# Altium PCB Jinkono Module вер.0.0.PcbDoc (part 2 of 2)
Units mm, origin at the board's own origin, x right, y up, seen from the top; angles counter-clockwise.
Board outline 90 x 80 mm, 2 copper layers (Top Layer, Bottom Layer); 154 components, 381 nets, 2588 pads, 0 vias.
Unrouted connection lines stored in the file: 1285.
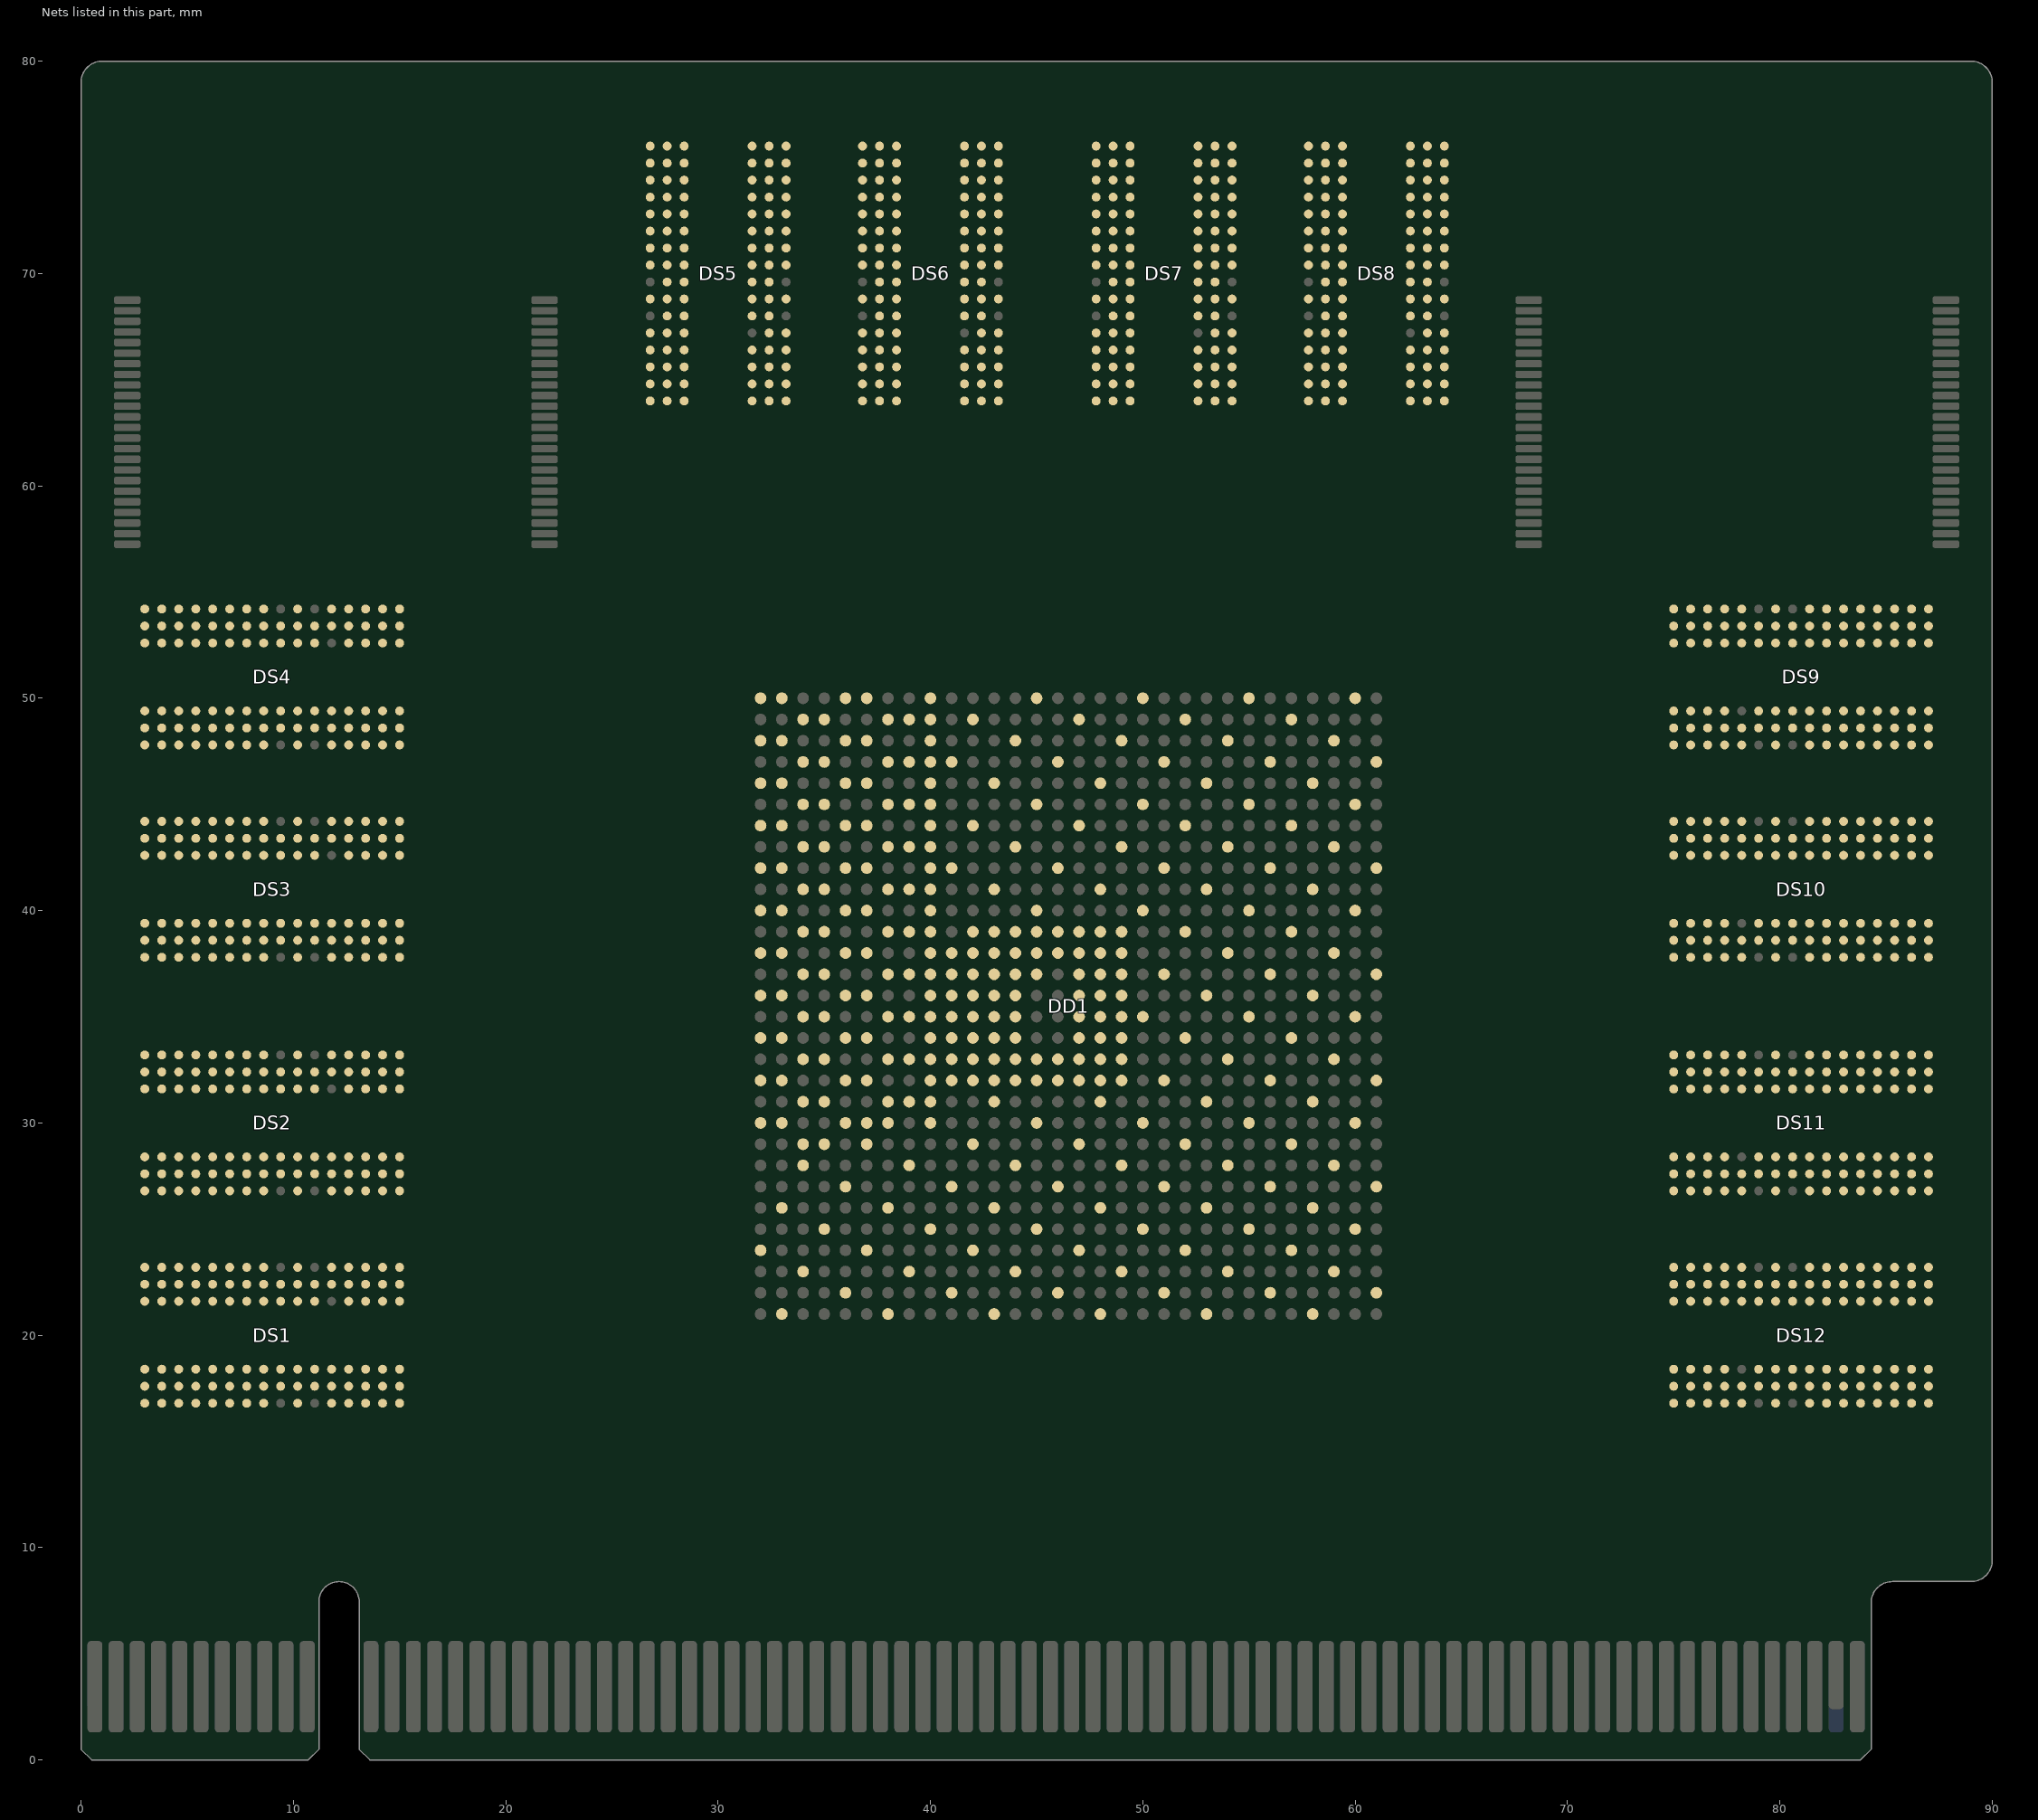
[diagram p2: the nets of this part, all layers, seen from the top]

## Part data
C1 C2 C3 C4 C5 C6 C7 C8 C9 C10 C11 C12 C13 C14 C15 C16 C17 C18: library part "Non Polar Hor.", TemperatureRange=-...+°C, ComponentType=Конденсатор, Install=1
C19 C20 C21 C25 C26 C27 C28 C29 C30 C40 C41 C42 C43 C44 C45 C46 C47 C48 C49 C50 C51: library part "Non Polar Ver.", "0603 10 мкФ ±10% 10 В X5R", TemperatureRange=-...+°C, ComponentType=Конденсатор, Install=1
C22 C23 C24 C31 C32 C33 C37 C38 C39: library part "Non Polar Ver.", "0402 0,1 мкФ ±10% 25 В X7R", TemperatureRange=-...+°C, ComponentType=Конденсатор, Install=1
C34 C35 C36: library part "Non Polar Ver.", "0402 0,01 мкФ ±10% 25 В X7R", TemperatureRange=-...+°C, ComponentType=Конденсатор, Install=1
DD1: library part XC7K325T-XFFG900, "Kintex-7 FPGA", Manufacturer="Xilinx Inc.", Package=900-FFG, TemperatureRange=-XX...+XX°C, ComponentType=IC, PinCount=900
DD2 DD3: library part MT29F32G08ABAAAWP-ITZ:A, "SLC NAND Flash 32 Гб", Manufacturer="Micron Technology, Inc.", Package=48-TSOP, TemperatureRange=-40...+85°C, ComponentType=IC, PartNumber=USB2534i-1080AEN, PinCount=48
DS1 DS2 DS3 DS4 DS5 DS6 DS7 DS8 DS9 DS10 DS11 DS12: library part MT41K256M16TW-107IT:P, "32 Megx16x8 banks DDR3L SDRAM", Manufacturer="Micron Technology, Inc.", TemperatureRange=-...+°C, ComponentType=Микросхема, Install=1
R1 R2 R3 R4 R5 R6 R7 R8 R9 R10 R11 R12 R13 R14 R15 R16 R17 R18 R19 R20 R21 R22 R23 R24 R25 R26 R27 R28 R29 R30 R31 R32 R33 R34 R35 R36 R37 R38 R39 R40 R41 R42 R43 R44 R45 R46 R47 R48 R49 R50 R51 R52 R53 R54 R55 R56 R57 R58 R59 R60 R61 R62 R63 R64 R65 R66 R67 R68 R69 R70 R71 R72 R73 R74 R75: library part "Resistor Hor.", TemperatureRange=-...+°C, ComponentType=Резистор, Install=1
R76 R77 R78: library part "Resistor Hor.", "0402 10 кОм ±1%", TemperatureRange=-...+°C, ComponentType=Резистор, Install=1
R79 R80 R81: library part "Resistor Ver.", "0402 10 кОм ±1%", TemperatureRange=-...+°C, ComponentType=Резистор, Install=1
R82 R83 R84: library part "Resistor Hor.", "0402 47 кОм ±5%", TemperatureRange=-...+°C, ComponentType=Резистор, Install=1
R85 R86 R87: library part "Resistor Ver.", "0402 47 кОм ±5%", TemperatureRange=-...+°C, ComponentType=Резистор, Install=1
XS1: library part XP_PCe_x16, TemperatureRange=-...+°C, ComponentType=Вилка, Install=1

## Nets (pads, with @x,y where several pads share a name; then routed paths per layer and width w, separated by ;. In a path a pad name is that pad's centre, name@x,y a point inside that pad or via, vN(x,y) a via of type N, cw(c..) or ccw(c..) an arc to the next point about the centre after c; other vN are vias at no path point)
1.5V_DDR3: C25.1 C26.1 C27.1 C28.1 C29.1 C30.1 C31.1 C32.1 C33.1 DS1.A1 DS1.A8 DS1.B2 DS1.C1 DS1.C9 DS1.D2 DS1.D9 DS1.E9 DS1.F1 DS1.G7 DS1.H2 DS1.H9 DS1.K2 DS1.K8 DS1.N1 DS1.N9 DS1.R1 DS1.R9 DS2.A1 DS2.A8 DS2.B2 DS2.C1 DS2.C9 DS2.D2 DS2.D9 DS2.E9 DS2.F1 DS2.G7 DS2.H2 DS2.H9 DS2.K2 DS2.K8 DS2.N1 DS2.N9 DS2.R1 DS2.R9 DS3.A1 DS3.A8 DS3.B2 DS3.C1 DS3.C9 DS3.D2 DS3.D9 DS3.E9 DS3.F1 DS3.G7 DS3.H2 DS3.H9 DS3.K2 DS3.K8 DS3.N1 DS3.N9 DS3.R1 DS3.R9 DS4.A1 DS4.A8 DS4.B2 DS4.C1 DS4.C9 DS4.D2 DS4.D9 DS4.E9 DS4.F1 DS4.G7 DS4.H2 DS4.H9 DS4.K2 DS4.K8 DS4.N1 DS4.N9 DS4.R1 DS4.R9 DS5.A1 DS5.A8 DS5.B2 DS5.C1 DS5.C9 DS5.D2 DS5.D9 DS5.E9 DS5.F1 DS5.G7 DS5.H2 DS5.H9 DS5.K2 DS5.K8 DS5.N1 DS5.N9 DS5.R1 DS5.R9 DS6.A1 DS6.A8 DS6.B2 DS6.C1 DS6.C9 DS6.D2 DS6.D9 DS6.E9 DS6.F1 DS6.G7 DS6.H2 DS6.H9 DS6.K2 DS6.K8 DS6.N1 DS6.N9 DS6.R1 DS6.R9 DS7.A1 DS7.A8 DS7.B2 DS7.C1 DS7.C9 DS7.D2 DS7.D9 DS7.E9 DS7.F1 DS7.G7 DS7.H2 DS7.H9 DS7.K2 DS7.K8 DS7.N1 DS7.N9 DS7.R1 DS7.R9 DS8.A1 DS8.A8 DS8.B2 DS8.C1 DS8.C9 DS8.D2 DS8.D9 DS8.E9 DS8.F1 DS8.G7 DS8.H2 DS8.H9 DS8.K2 DS8.K8 DS8.N1 DS8.N9 DS8.R1 DS8.R9 DS9.A1 DS9.A8 DS9.B2 DS9.C1 DS9.C9 DS9.D2 DS9.D9 DS9.E9 DS9.F1 DS9.G7 DS9.H2 DS9.H9 DS9.K2 DS9.K8 DS9.N1 DS9.N9 DS9.R1 DS9.R9 DS10.A1 DS10.A8 DS10.B2 DS10.C1 DS10.C9 DS10.D2 DS10.D9 DS10.E9 DS10.F1 DS10.G7 DS10.H2 DS10.H9 DS10.K2 DS10.K8 DS10.N1 DS10.N9 DS10.R1 DS10.R9 DS11.A1 DS11.A8 DS11.B2 DS11.C1 DS11.C9 DS11.D2 DS11.D9 DS11.E9 DS11.F1 DS11.G7 DS11.H2 DS11.H9 DS11.K2 DS11.K8 DS11.N1 DS11.N9 DS11.R1 DS11.R9 DS12.A1 DS12.A8 DS12.B2 DS12.C1 DS12.C9 DS12.D2 DS12.D9 DS12.E9 DS12.F1 DS12.G7 DS12.H2 DS12.H9 DS12.K2 DS12.K8 DS12.N1 DS12.N9 DS12.R1 DS12.R9 R76.1 R77.1 R78.1
3.3V: C19.1 C20.1 C21.1 C22.1 C23.1 C24.1 R82.1 R83.1 R84.1
DDR3_A0_ZQ: DS1.L8 DS5.L8 DS9.L8
DDR3_A1_ZQ: DS2.L8 DS6.L8 DS10.L8
DDR3_A2_ZQ: DS3.L8 DS7.L8 DS11.L8
DDR3_A3_ZQ: DS4.L8 DS8.L8 DS12.L8
DDR3_A_A0: DS1.N3 DS2.N3 DS3.N3 DS4.N3 R1.1
DDR3_A_A1: DS1.P7 DS2.P7 DS3.P7 DS4.P7 R14.1
DDR3_A_A2: DS1.P3 DS2.P3 DS3.P3 DS4.P3 R2.1
DDR3_A_A3: DS1.N2 DS2.N2 DS3.N2 DS4.N2 R15.1
DDR3_A_A4: DS1.P8 DS2.P8 DS3.P8 DS4.P8 R3.1
DDR3_A_A5: DS1.P2 DS2.P2 DS3.P2 DS4.P2 R16.1
DDR3_A_A6: DS1.R8 DS2.R8 DS3.R8 DS4.R8 R4.1
DDR3_A_A7: DS1.R2 DS2.R2 DS3.R2 DS4.R2 R17.1
DDR3_A_A8: DS1.T8 DS2.T8 DS3.T8 DS4.T8 R5.1
DDR3_A_A9: DS1.R3 DS2.R3 DS3.R3 DS4.R3 R18.1
DDR3_A_A10: DS1.L7 DS2.L7 DS3.L7 DS4.L7 R6.1
DDR3_A_A11: DS1.R7 DS2.R7 DS3.R7 DS4.R7 R19.1
DDR3_A_A12: DS1.N7 DS2.N7 DS3.N7 DS4.N7 R7.1
DDR3_A_A13: DS1.T3 DS2.T3 DS3.T3 DS4.T3 R20.1
DDR3_A_A14: DS1.T7 DS2.T7 DS3.T7 DS4.T7 R8.1
DDR3_A_BA0: DS1.M2 DS2.M2 DS3.M2 DS4.M2 R21.1
DDR3_A_BA1: DS1.N8 DS2.N8 DS3.N8 DS4.N8 R9.1
DDR3_A_BA2: DS1.M3 DS2.M3 DS3.M3 DS4.M3 R22.1
DDR3_A_CK_N: DS1.K7 DS2.K7 DS3.K7 DS4.K7 R13.2
DDR3_A_CK_P: DS1.J7 DS2.J7 DS3.J7 DS4.J7 R13.1
DDR3_A_CKE: DS1.K9 DS2.K9 DS3.K9 DS4.K9 R10.1
DDR3_A_DM0: DS1.E7
DDR3_A_DM1: DS1.D3
DDR3_A_DM2: DS2.E7
DDR3_A_DM3: DS2.D3
DDR3_A_DM4: DS3.E7
DDR3_A_DM5: DS3.D3
DDR3_A_DM6: DS4.E7
DDR3_A_DM7: DS4.D3
DDR3_A_DQ0: DS1.E3
DDR3_A_DQ1: DS1.F7
DDR3_A_DQ2: DS1.F2
DDR3_A_DQ3: DS1.F8
DDR3_A_DQ4: DS1.H3
DDR3_A_DQ5: DS1.H8
DDR3_A_DQ6: DS1.G2
DDR3_A_DQ7: DS1.H7
DDR3_A_DQ8: DS1.D7
DDR3_A_DQ9: DS1.C3
DDR3_A_DQ10: DS1.C8
DDR3_A_DQ11: DS1.C2
DDR3_A_DQ12: DS1.A7
DDR3_A_DQ13: DS1.A2
DDR3_A_DQ14: DS1.B8
DDR3_A_DQ15: DS1.A3
DDR3_A_DQ16: DS2.E3
DDR3_A_DQ17: DS2.F7
DDR3_A_DQ18: DS2.F2
DDR3_A_DQ19: DS2.F8
DDR3_A_DQ20: DS2.H3
DDR3_A_DQ21: DS2.H8
DDR3_A_DQ22: DS2.G2
DDR3_A_DQ23: DS2.H7
DDR3_A_DQ24: DS2.D7
DDR3_A_DQ25: DS2.C3
DDR3_A_DQ26: DS2.C8
DDR3_A_DQ27: DS2.C2
DDR3_A_DQ28: DS2.A7
DDR3_A_DQ29: DS2.A2
DDR3_A_DQ30: DS2.B8
DDR3_A_DQ31: DS2.A3
DDR3_A_DQ32: DS3.E3
DDR3_A_DQ33: DS3.F7
DDR3_A_DQ34: DS3.F2
DDR3_A_DQ35: DS3.F8
DDR3_A_DQ36: DS3.H3
DDR3_A_DQ37: DS3.H8
DDR3_A_DQ38: DS3.G2
DDR3_A_DQ39: DS3.H7
DDR3_A_DQ40: DS3.D7
DDR3_A_DQ41: DS3.C3
DDR3_A_DQ42: DS3.C8
DDR3_A_DQ43: DS3.C2
DDR3_A_DQ44: DS3.A7
DDR3_A_DQ45: DS3.A2
DDR3_A_DQ46: DS3.B8
DDR3_A_DQ47: DS3.A3
DDR3_A_DQ48: DS4.E3
DDR3_A_DQ49: DS4.F7
DDR3_A_DQ50: DS4.F2
DDR3_A_DQ51: DS4.F8
DDR3_A_DQ52: DS4.H3
DDR3_A_DQ53: DS4.H8
DDR3_A_DQ54: DS4.G2
DDR3_A_DQ55: DS4.H7
DDR3_A_DQ56: DS4.D7
DDR3_A_DQ57: DS4.C3
DDR3_A_DQ58: DS4.C8
DDR3_A_DQ59: DS4.C2
DDR3_A_DQ60: DS4.A7
DDR3_A_DQ61: DS4.A2
DDR3_A_DQ62: DS4.B8
DDR3_A_DQ63: DS4.A3
DDR3_A_DQS0_N: DS1.G3
DDR3_A_DQS0_P: DS1.F3
DDR3_A_DQS1_N: DS1.B7
DDR3_A_DQS1_P: DS1.C7
DDR3_A_DQS2_N: DS2.G3
DDR3_A_DQS2_P: DS2.F3
DDR3_A_DQS3_N: DS2.B7
DDR3_A_DQS3_P: DS2.C7
DDR3_A_DQS4_N: DS3.G3
DDR3_A_DQS4_P: DS3.F3
DDR3_A_DQS5_N: DS3.B7
DDR3_A_DQS5_P: DS3.C7
DDR3_A_DQS6_N: DS4.G3
DDR3_A_DQS6_P: DS4.F3
DDR3_A_DQS7_N: DS4.B7
DDR3_A_DQS7_P: DS4.C7
DDR3_A_nCAS: DS1.K3 DS2.K3 DS3.K3 DS4.K3 R24.1
DDR3_A_nCS: DS1.L2 DS2.L2 DS3.L2 DS4.L2 R23.1
DDR3_A_nRAS: DS1.J3 DS2.J3 DS3.J3 DS4.J3 R11.1
DDR3_A_nRST: DS1.T2 DS2.T2 DS3.T2 DS4.T2
DDR3_A_nWE: DS1.L3 DS2.L3 DS3.L3 DS4.L3 R12.1
DDR3_A_ODT: DS1.K1 DS2.K1 DS3.K1 DS4.K1 R25.1
DDR3_B_A0: DS5.N3 DS6.N3 DS7.N3 DS8.N3 R26.1
DDR3_B_A1: DS5.P7 DS6.P7 DS7.P7 DS8.P7 R39.1
DDR3_B_A2: DS5.P3 DS6.P3 DS7.P3 DS8.P3 R27.1
DDR3_B_A3: DS5.N2 DS6.N2 DS7.N2 DS8.N2 R40.1
DDR3_B_A4: DS5.P8 DS6.P8 DS7.P8 DS8.P8 R28.1
DDR3_B_A5: DS5.P2 DS6.P2 DS7.P2 DS8.P2 R41.1
DDR3_B_A6: DS5.R8 DS6.R8 DS7.R8 DS8.R8 R29.1
DDR3_B_A7: DS5.R2 DS6.R2 DS7.R2 DS8.R2 R42.1
DDR3_B_A8: DS5.T8 DS6.T8 DS7.T8 DS8.T8 R30.1
DDR3_B_A9: DS5.R3 DS6.R3 DS7.R3 DS8.R3 R43.1
DDR3_B_A10: DS5.L7 DS6.L7 DS7.L7 DS8.L7 R31.1
DDR3_B_A11: DS5.R7 DS6.R7 DS7.R7 DS8.R7 R44.1
DDR3_B_A12: DS5.N7 DS6.N7 DS7.N7 DS8.N7 R32.1
DDR3_B_A13: DS5.T3 DS6.T3 DS7.T3 DS8.T3 R45.1
DDR3_B_A14: DS5.T7 DS6.T7 DS7.T7 DS8.T7 R33.1
DDR3_B_BA0: DS5.M2 DS6.M2 DS7.M2 DS8.M2 R46.1
DDR3_B_BA1: DS5.N8 DS6.N8 DS7.N8 DS8.N8 R34.1
DDR3_B_BA2: DS5.M3 DS6.M3 DS7.M3 DS8.M3 R47.1
DDR3_B_CK_N: DS5.K7 DS6.K7 DS7.K7 DS8.K7 R38.2
DDR3_B_CK_P: DS5.J7 DS6.J7 DS7.J7 DS8.J7 R38.1
DDR3_B_CKE: DS5.K9 DS6.K9 DS7.K9 DS8.K9 R35.1
DDR3_B_DM0: DS5.E7
DDR3_B_DM1: DS5.D3
DDR3_B_DM2: DS6.E7
DDR3_B_DM3: DS6.D3
DDR3_B_DM4: DS7.E7
DDR3_B_DM5: DS7.D3
DDR3_B_DM6: DS8.E7
DDR3_B_DM7: DS8.D3
DDR3_B_DQ0: DS5.E3
DDR3_B_DQ1: DS5.F7
DDR3_B_DQ2: DS5.F2
DDR3_B_DQ3: DS5.F8
DDR3_B_DQ4: DS5.H3
DDR3_B_DQ5: DS5.H8
DDR3_B_DQ6: DS5.G2
DDR3_B_DQ7: DS5.H7
DDR3_B_DQ8: DS5.D7
DDR3_B_DQ9: DS5.C3
DDR3_B_DQ10: DS5.C8
DDR3_B_DQ11: DS5.C2
DDR3_B_DQ12: DS5.A7
DDR3_B_DQ13: DS5.A2
DDR3_B_DQ14: DS5.B8
DDR3_B_DQ15: DS5.A3
DDR3_B_DQ16: DS6.E3
DDR3_B_DQ17: DS6.F7
DDR3_B_DQ18: DS6.F2
DDR3_B_DQ19: DS6.F8
DDR3_B_DQ20: DS6.H3
DDR3_B_DQ21: DS6.H8
DDR3_B_DQ22: DS6.G2
DDR3_B_DQ23: DS6.H7
DDR3_B_DQ24: DS6.D7
DDR3_B_DQ25: DS6.C3
DDR3_B_DQ26: DS6.C8
DDR3_B_DQ27: DS6.C2
DDR3_B_DQ28: DS6.A7
DDR3_B_DQ29: DS6.A2
DDR3_B_DQ30: DS6.B8
DDR3_B_DQ31: DS6.A3
DDR3_B_DQ32: DS7.E3
DDR3_B_DQ33: DS7.F7
DDR3_B_DQ34: DS7.F2
DDR3_B_DQ35: DS7.F8
DDR3_B_DQ36: DS7.H3
DDR3_B_DQ37: DS7.H8
DDR3_B_DQ38: DS7.G2
DDR3_B_DQ39: DS7.H7
DDR3_B_DQ40: DS7.D7
DDR3_B_DQ41: DS7.C3
DDR3_B_DQ42: DS7.C8
DDR3_B_DQ43: DS7.C2
DDR3_B_DQ44: DS7.A7
DDR3_B_DQ45: DS7.A2
DDR3_B_DQ46: DS7.B8
DDR3_B_DQ47: DS7.A3
DDR3_B_DQ48: DS8.E3
DDR3_B_DQ49: DS8.F7
DDR3_B_DQ50: DS8.F2
DDR3_B_DQ51: DS8.F8
DDR3_B_DQ52: DS8.H3
DDR3_B_DQ53: DS8.H8
DDR3_B_DQ54: DS8.G2
DDR3_B_DQ55: DS8.H7
DDR3_B_DQ56: DS8.D7
DDR3_B_DQ57: DS8.C3
DDR3_B_DQ58: DS8.C8
DDR3_B_DQ59: DS8.C2
DDR3_B_DQ60: DS8.A7
DDR3_B_DQ61: DS8.A2
DDR3_B_DQ62: DS8.B8
DDR3_B_DQ63: DS8.A3
DDR3_B_DQS0_N: DS5.G3
DDR3_B_DQS0_P: DS5.F3
DDR3_B_DQS1_N: DS5.B7
DDR3_B_DQS1_P: DS5.C7
DDR3_B_DQS2_N: DS6.G3
DDR3_B_DQS2_P: DS6.F3
DDR3_B_DQS3_N: DS6.B7
DDR3_B_DQS3_P: DS6.C7
DDR3_B_DQS4_N: DS7.G3
DDR3_B_DQS4_P: DS7.F3
DDR3_B_DQS5_N: DS7.B7
DDR3_B_DQS5_P: DS7.C7
DDR3_B_DQS6_N: DS8.G3
DDR3_B_DQS6_P: DS8.F3
DDR3_B_DQS7_N: DS8.B7
DDR3_B_DQS7_P: DS8.C7
DDR3_B_nCAS: DS5.K3 DS6.K3 DS7.K3 DS8.K3 R49.1
DDR3_B_nCS: DS5.L2 DS6.L2 DS7.L2 DS8.L2 R48.1
DDR3_B_nRAS: DS5.J3 DS6.J3 DS7.J3 DS8.J3 R36.1
DDR3_B_nRST: DS5.T2 DS6.T2 DS7.T2 DS8.T2
DDR3_B_nWE: DS5.L3 DS6.L3 DS7.L3 DS8.L3 R37.1
DDR3_B_ODT: DS5.K1 DS6.K1 DS7.K1 DS8.K1 R50.1
DDR3_C_A0: DS9.N3 DS10.N3 DS11.N3 DS12.N3 R51.1
DDR3_C_A1: DS9.P7 DS10.P7 DS11.P7 DS12.P7 R64.1
DDR3_C_A2: DS9.P3 DS10.P3 DS11.P3 DS12.P3 R52.1
DDR3_C_A3: DS9.N2 DS10.N2 DS11.N2 DS12.N2 R65.1
DDR3_C_A4: DS9.P8 DS10.P8 DS11.P8 DS12.P8 R53.1
DDR3_C_A5: DS9.P2 DS10.P2 DS11.P2 DS12.P2 R66.1
DDR3_C_A6: DS9.R8 DS10.R8 DS11.R8 DS12.R8 R54.1
DDR3_C_A7: DS9.R2 DS10.R2 DS11.R2 DS12.R2 R67.1
DDR3_C_A8: DS9.T8 DS10.T8 DS11.T8 DS12.T8 R55.1
DDR3_C_A9: DS9.R3 DS10.R3 DS11.R3 DS12.R3 R68.1
DDR3_C_A10: DS9.L7 DS10.L7 DS11.L7 DS12.L7 R56.1
DDR3_C_A11: DS9.R7 DS10.R7 DS11.R7 DS12.R7 R69.1
DDR3_C_A12: DS9.N7 DS10.N7 DS11.N7 DS12.N7 R57.1
DDR3_C_A13: DS9.T3 DS10.T3 DS11.T3 DS12.T3 R70.1
DDR3_C_A14: DS9.T7 DS10.T7 DS11.T7 DS12.T7 R58.1
DDR3_C_BA0: DS9.M2 DS10.M2 DS11.M2 DS12.M2 R71.1
DDR3_C_BA1: DS9.N8 DS10.N8 DS11.N8 DS12.N8 R59.1
DDR3_C_BA2: DS9.M3 DS10.M3 DS11.M3 DS12.M3 R72.1
DDR3_C_CK_N: DS9.K7 DS10.K7 DS11.K7 DS12.K7 R63.2
DDR3_C_CK_P: DS9.J7 DS10.J7 DS11.J7 DS12.J7 R63.1
DDR3_C_CKE: DS9.K9 DS10.K9 DS11.K9 DS12.K9 R60.1
DDR3_C_DM0: DS9.E7
DDR3_C_DM1: DS9.D3
DDR3_C_DM2: DS10.E7
DDR3_C_DM3: DS10.D3
DDR3_C_DM4: DS11.E7
DDR3_C_DM5: DS11.D3
DDR3_C_DM6: DS12.E7
DDR3_C_DM7: DS12.D3
DDR3_C_DQ0: DS9.E3
DDR3_C_DQ1: DS9.F7
DDR3_C_DQ2: DS9.F2
DDR3_C_DQ3: DS9.F8
DDR3_C_DQ4: DS9.H3
DDR3_C_DQ5: DS9.H8
DDR3_C_DQ6: DS9.G2
DDR3_C_DQ7: DS9.H7
DDR3_C_DQ8: DS9.D7
DDR3_C_DQ9: DS9.C3
DDR3_C_DQ10: DS9.C8
DDR3_C_DQ11: DS9.C2
DDR3_C_DQ12: DS9.A7
DDR3_C_DQ13: DS9.A2
DDR3_C_DQ14: DS9.B8
DDR3_C_DQ15: DS9.A3
DDR3_C_DQ16: DS10.E3
DDR3_C_DQ17: DS10.F7
DDR3_C_DQ18: DS10.F2
DDR3_C_DQ19: DS10.F8
DDR3_C_DQ20: DS10.H3
DDR3_C_DQ21: DS10.H8
DDR3_C_DQ22: DS10.G2
DDR3_C_DQ23: DS10.H7
DDR3_C_DQ24: DS10.D7
DDR3_C_DQ25: DS10.C3
DDR3_C_DQ26: DS10.C8
DDR3_C_DQ27: DS10.C2
DDR3_C_DQ28: DS10.A7
DDR3_C_DQ29: DS10.A2
DDR3_C_DQ30: DS10.B8
DDR3_C_DQ31: DS10.A3
DDR3_C_DQ32: DS11.E3
DDR3_C_DQ33: DS11.F7
DDR3_C_DQ34: DS11.F2
DDR3_C_DQ35: DS11.F8
DDR3_C_DQ36: DS11.H3
DDR3_C_DQ37: DS11.H8
DDR3_C_DQ38: DS11.G2
DDR3_C_DQ39: DS11.H7
DDR3_C_DQ40: DS11.D7
DDR3_C_DQ41: DS11.C3
DDR3_C_DQ42: DS11.C8
DDR3_C_DQ43: DS11.C2
DDR3_C_DQ44: DS11.A7
DDR3_C_DQ45: DS11.A2
DDR3_C_DQ46: DS11.B8
DDR3_C_DQ47: DS11.A3
DDR3_C_DQ48: DS12.E3
DDR3_C_DQ49: DS12.F7
DDR3_C_DQ50: DS12.F2
DDR3_C_DQ51: DS12.F8
DDR3_C_DQ52: DS12.H3
DDR3_C_DQ53: DS12.H8
DDR3_C_DQ54: DS12.G2
DDR3_C_DQ55: DS12.H7
DDR3_C_DQ56: DS12.D7
DDR3_C_DQ57: DS12.C3
DDR3_C_DQ58: DS12.C8
DDR3_C_DQ59: DS12.C2
DDR3_C_DQ60: DS12.A7
DDR3_C_DQ61: DS12.A2
DDR3_C_DQ62: DS12.B8
DDR3_C_DQ63: DS12.A3
DDR3_C_DQS0_N: DS9.G3
DDR3_C_DQS0_P: DS9.F3
DDR3_C_DQS1_N: DS9.B7
DDR3_C_DQS1_P: DS9.C7
DDR3_C_DQS2_N: DS10.G3
DDR3_C_DQS2_P: DS10.F3
DDR3_C_DQS3_N: DS10.B7
DDR3_C_DQS3_P: DS10.C7
DDR3_C_DQS4_N: DS11.G3
DDR3_C_DQS4_P: DS11.F3
DDR3_C_DQS5_N: DS11.B7
DDR3_C_DQS5_P: DS11.C7
DDR3_C_DQS6_N: DS12.G3
DDR3_C_DQS6_P: DS12.F3
DDR3_C_DQS7_N: DS12.B7
DDR3_C_DQS7_P: DS12.C7
DDR3_C_nCAS: DS9.K3 DS10.K3 DS11.K3 DS12.K3 R74.1
DDR3_C_nCS: DS9.L2 DS10.L2 DS11.L2 DS12.L2 R73.1
DDR3_C_nRAS: DS9.J3 DS10.J3 DS11.J3 DS12.J3 R61.1
DDR3_C_nRST: DS9.T2 DS10.T2 DS11.T2 DS12.T2
DDR3_C_nWE: DS9.L3 DS10.L3 DS11.L3 DS12.L3 R62.1
DDR3_C_ODT: DS9.K1 DS10.K1 DS11.K1 DS12.K1 R75.1
EN_VTT_A: R85.1 R86.1 R87.1
GND: C1.2 C2.2 C3.2 C4.2 C5.2 C6.2 C7.2 C8.2 C9.2 C10.2 C11.2 C12.2 C13.2 C14.2 C15.2 C16.2 C17.2 C18.2 C19.2 C20.2 C21.2 C22.2 C23.2 C24.2 C25.2 C26.2 C27.2 C28.2 C29.2 C30.2 C31.2 C32.2 C33.2 C34.2 C35.2 C36.2 C37.2 C38.2 C39.2 C40.2 C41.2 C42.2 C43.2 C44.2 C45.2 C46.2 C47.2 C48.2 C49.2 C50.2 C51.2 DD1.A1 DD1.A2 DD1.A5 DD1.A6 DD1.A9 DD1.A14 DD1.A24 DD1.AA1 DD1.AA2 DD1.AA5 DD1.AA6 DD1.AA7 DD1.AA14 DD1.AA24 DD1.AB3 DD1.AB4 DD1.AB11 DD1.AB21 DD1.AC8 DD1.AC18 DD1.AC28 DD1.AD5 DD1.AD15 DD1.AD25 DD1.AE2 DD1.AE12 DD1.AE22 DD1.AF9 DD1.AF19 DD1.AF29 DD1.AG6 DD1.AG16 DD1.AG26 DD1.AH3 DD1.AH13 DD1.AH23 DD1.AJ10 DD1.AJ20 DD1.AJ30 DD1.AK7 DD1.AK17 DD1.AK27 DD1.B4 DD1.B8 DD1.B9 DD1.B11 DD1.B21 DD1.C1 DD1.C2 DD1.C6 DD1.C9 DD1.C18 DD1.C28 DD1.D4 DD1.D8 DD1.D9 DD1.D15 DD1.D25 DD1.E1 DD1.E2 DD1.E6 DD1.E9 DD1.E12 DD1.E22 DD1.F4 DD1.F8 DD1.F9 DD1.F19 DD1.F29 DD1.G1 DD1.G2 DD1.G6 DD1.G9 DD1.G16 DD1.G26 DD1.H4 DD1.H8 DD1.H9 DD1.H13 DD1.H23 DD1.J1 DD1.J2 DD1.J6 DD1.J9 DD1.J10 DD1.J20 DD1.J30 DD1.K4 DD1.K8 DD1.K9 DD1.K17 DD1.K27 DD1.L1 DD1.L2 DD1.L6 DD1.L9 DD1.L14 DD1.L24 DD1.M4 DD1.M8 DD1.M9 DD1.M12 DD1.M14 DD1.M16 DD1.M18 DD1.M21 DD1.N1 DD1.N2 DD1.N6 DD1.N9 DD1.N11 DD1.N13 DD1.N15 DD1.N17 DD1.N28 DD1.P4 DD1.P8 DD1.P9 DD1.P10 DD1.P12 DD1.P14 DD1.P16 DD1.P18 DD1.P25 DD1.R1 DD1.R2 DD1.R6 DD1.R9 DD1.R11 DD1.R13 DD1.R17 DD1.R22 DD1.T4 DD1.T8 DD1.T10 DD1.T12 DD1.T16 DD1.T18 DD1.T19 DD1.T29 DD1.U1 DD1.U2 DD1.U6 DD1.U9 DD1.U11 DD1.U13 DD1.U17 DD1.U26 DD1.V4 DD1.V8 DD1.V9 DD1.V10 DD1.V12 DD1.V14 DD1.V16 DD1.V18 DD1.V23 DD1.W1 DD1.W2 DD1.W6 DD1.W9 DD1.W11 DD1.W13 DD1.W15 DD1.W17 DD1.W20 DD1.W30 DD1.Y3 DD1.Y4 DD1.Y7 DD1.Y8 DD1.Y9 DD1.Y17 DD1.Y27 DS1.A9 DS1.B1 DS1.B3 DS1.B9 DS1.D1 DS1.D8 DS1.E1 DS1.E2 DS1.E8 DS1.F9 DS1.G1 DS1.G8 DS1.G9 DS1.J2 DS1.J8 DS1.M1 DS1.M9 DS1.P1 DS1.P9 DS1.T1 DS1.T9 DS2.A9 DS2.B1 DS2.B3 DS2.B9 DS2.D1 DS2.D8 DS2.E1 DS2.E2 DS2.E8 DS2.F9 DS2.G1 DS2.G8 DS2.G9 DS2.J2 DS2.J8 DS2.M1 DS2.M9 DS2.P1 DS2.P9 DS2.T1 DS2.T9 DS3.A9 DS3.B1 DS3.B3 DS3.B9 DS3.D1 DS3.D8 DS3.E1 DS3.E2 DS3.E8 DS3.F9 DS3.G1 DS3.G8 DS3.G9 DS3.J2 DS3.J8 DS3.M1 DS3.M9 DS3.P1 DS3.P9 DS3.T1 DS3.T9 DS4.A9 DS4.B1 DS4.B3 DS4.B9 DS4.D1 DS4.D8 DS4.E1 DS4.E2 DS4.E8 DS4.F9 DS4.G1 DS4.G8 DS4.G9 DS4.J2 DS4.J8 DS4.M1 DS4.M9 DS4.P1 DS4.P9 DS4.T1 DS4.T9 DS5.A9 DS5.B1 DS5.B3 DS5.B9 DS5.D1 DS5.D8 DS5.E1 DS5.E2 DS5.E8 DS5.F9 DS5.G1 DS5.G8 DS5.G9 DS5.J2 DS5.J8 DS5.M1 DS5.M9 DS5.P1 DS5.P9 DS5.T1 DS5.T9 DS6.A9 DS6.B1 DS6.B3 DS6.B9 DS6.D1 DS6.D8 DS6.E1 DS6.E2 DS6.E8 DS6.F9 DS6.G1 DS6.G8 DS6.G9 DS6.J2 DS6.J8 DS6.M1 DS6.M9 DS6.P1 DS6.P9 DS6.T1 DS6.T9 DS7.A9 DS7.B1 DS7.B3 DS7.B9 DS7.D1 DS7.D8 DS7.E1 DS7.E2 DS7.E8 DS7.F9 DS7.G1 DS7.G8 DS7.G9 DS7.J2 DS7.J8 DS7.M1 DS7.M9 DS7.P1 DS7.P9 DS7.T1 DS7.T9 DS8.A9 DS8.B1 DS8.B3 DS8.B9 DS8.D1 DS8.D8 DS8.E1 DS8.E2 DS8.E8 DS8.F9 DS8.G1 DS8.G8 DS8.G9 DS8.J2 DS8.J8 DS8.M1 DS8.M9 DS8.P1 DS8.P9 DS8.T1 DS8.T9 DS9.A9 DS9.B1 DS9.B3 DS9.B9 DS9.D1 DS9.D8 DS9.E1 DS9.E2 DS9.E8 DS9.F9 DS9.G1 DS9.G8 DS9.G9 DS9.J2 DS9.J8 DS9.M1 DS9.M9 DS9.P1 DS9.P9 DS9.T1 DS9.T9 DS10.A9 DS10.B1 DS10.B3 DS10.B9 DS10.D1 DS10.D8 DS10.E1 DS10.E2 DS10.E8 DS10.F9 DS10.G1 DS10.G8 DS10.G9 DS10.J2 DS10.J8 DS10.M1 DS10.M9 DS10.P1 DS10.P9 DS10.T1 DS10.T9 DS11.A9 DS11.B1 DS11.B3 DS11.B9 DS11.D1 DS11.D8 DS11.E1 DS11.E2 DS11.E8 DS11.F9 DS11.G1 DS11.G8 DS11.G9 DS11.J2 DS11.J8 DS11.M1 DS11.M9 DS11.P1 DS11.P9 DS11.T1 DS11.T9 DS12.A9 DS12.B1 DS12.B3 DS12.B9 DS12.D1 DS12.D8 DS12.E1 DS12.E2 DS12.E8 DS12.F9 DS12.G1 DS12.G8 DS12.G9 DS12.J2 DS12.J8 DS12.M1 DS12.M9 DS12.P1 DS12.P9 DS12.T1 DS12.T9 R79.2 R80.2 R81.2 R85.2 R86.2 R87.2
NetC34_1: C34.1 R76.2 R79.1
NetC35_1: C35.1 R77.2 R80.1
NetC36_1: C36.1 R78.2 R81.1
NetDD1_A19: DD1.A19 DD1.B16 DD1.D20 DD1.E17 DD1.G21 DD1.H18 DD1.L19
NetDD1_A29: DD1.A29 DD1.B26 DD1.C23 DD1.D30 DD1.E27 DD1.F24 DD1.H28
NetDD1_AA9: DD1.AA9 DD1.AC13 DD1.AD10 DD1.AG11 DD1.AK12 DD1.Y12
NetDD1_AA19: DD1.AA19 DD1.AB16 DD1.AE17 DD1.AF14 DD1.AH18 DD1.AJ15
NetDD1_AA29: DD1.AA29 DD1.AB26 DD1.AD30 DD1.AE27 DD1.AH28 DD1.AJ25
NetDD1_AB6: DD1.AB6 DD1.T9
NetDD1_AC3: DD1.AC3 DD1.AE7 DD1.AF4 DD1.AG1 DD1.AH8 DD1.AJ5 DD1.AK2
NetDD1_AC23: DD1.AC23 DD1.AD20 DD1.AF24 DD1.AG21 DD1.AK22 DD1.Y22
NetDD1_B3: DD1.B3 DD1.C5 DD1.D3 DD1.E5 DD1.F3 DD1.G5 DD1.H3 DD1.J5 DD1.K3 DD1.L5 DD1.M3 DD1.N5 DD1.P3 DD1.R5 DD1.T3 DD1.U5 DD1.V3 DD1.W5
NetDD1_B7: DD1.B7 DD1.D7 DD1.F7 DD1.H7 DD1.K7 DD1.M7 DD1.P7
NetDD1_C13: DD1.C13 DD1.D10 DD1.F14 DD1.G11 DD1.J15 DD1.K12
NetDD1_J25: DD1.J25 DD1.K22 DD1.L29 DD1.M26 DD1.N23 DD1.P20
NetDD1_M11: DD1.M11 DD1.M13 DD1.M15 DD1.M17 DD1.N10 DD1.N12 DD1.N14 DD1.N18 DD1.P11 DD1.P17 DD1.R10 DD1.R12 DD1.R18 DD1.T11 DD1.T17 DD1.U10 DD1.U12 DD1.U18 DD1.V17 DD1.W18
NetDD1_N16: DD1.N16 DD1.R16 DD1.U16 DD1.W16
NetDD1_P13: DD1.P13 DD1.T13 DD1.V13 DD1.V15 DD1.W14
NetDD1_P30: DD1.P30 DD1.R27 DD1.T24 DD1.U21 DD1.V28 DD1.W25
NetDD1_T7: DD1.T7 DD1.V7
NetDD1_V11: DD1.V11 DD1.W10 DD1.W12
PGD_VTT_A: R82.2 R83.2 R84.2
VREF_A: C37.1 C40.1 DS1.H1 DS1.M8 DS2.H1 DS2.M8 DS3.H1 DS3.M8 DS4.H1 DS4.M8
VREF_B: C38.1 C41.1 DS5.H1 DS5.M8 DS6.H1 DS6.M8 DS7.H1 DS7.M8 DS8.H1 DS8.M8
VREF_C: C39.1 C42.1 DS9.H1 DS9.M8 DS10.H1 DS10.M8 DS11.H1 DS11.M8 DS12.H1 DS12.M8
VTT_A: C1.1 C2.1 C3.1 C4.1 C5.1 C6.1 C43.1 C46.1 C49.1 R1.2 R2.2 R3.2 R4.2 R5.2 R6.2 R7.2 R8.2 R9.2 R10.2 R11.2 R12.2 R14.2 R15.2 R16.2 R17.2 R18.2 R19.2 R20.2 R21.2 R22.2 R23.2 R24.2 R25.2
VTT_B: C7.1 C8.1 C9.1 C10.1 C11.1 C12.1 C44.1 C47.1 C50.1 R26.2 R27.2 R28.2 R29.2 R30.2 R31.2 R32.2 R33.2 R34.2 R35.2 R36.2 R37.2 R39.2 R40.2 R41.2 R42.2 R43.2 R44.2 R45.2 R46.2 R47.2 R48.2 R49.2 R50.2
VTT_C: C13.1 C14.1 C15.1 C16.1 C17.1 C18.1 C45.1 C48.1 C51.1 R51.2 R52.2 R53.2 R54.2 R55.2 R56.2 R57.2 R58.2 R59.2 R60.2 R61.2 R62.2 R64.2 R65.2 R66.2 R67.2 R68.2 R69.2 R70.2 R71.2 R72.2 R73.2 R74.2 R75.2
pads on no net: DD1.A3 DD1.A4 DD1.A7 DD1.A8 DD1.A10 DD1.A11 DD1.A12 DD1.A13 DD1.A15 DD1.A16 DD1.A17 DD1.A18 DD1.A20 DD1.A21 DD1.A22 DD1.A23 DD1.A25 DD1.A26 DD1.A27 DD1.A28 DD1.A30 DD1.AA3 DD1.AA4 DD1.AA8 DD1.AA10 DD1.AA11 DD1.AA12 DD1.AA13 DD1.AA15 DD1.AA16 DD1.AA17 DD1.AA18 DD1.AA20 DD1.AA21 DD1.AA22 DD1.AA23 DD1.AA25 DD1.AA26 DD1.AA27 DD1.AA28 DD1.AA30 DD1.AB1 DD1.AB2 DD1.AB5 DD1.AB7 DD1.AB8 DD1.AB9 DD1.AB10 DD1.AB12 DD1.AB13 DD1.AB14 DD1.AB15 DD1.AB17 DD1.AB18 DD1.AB19 DD1.AB20 DD1.AB22 DD1.AB23 DD1.AB24 DD1.AB25 DD1.AB27 DD1.AB28 DD1.AB29 DD1.AB30 DD1.AC1 DD1.AC2 DD1.AC4 DD1.AC5 DD1.AC6 DD1.AC7 DD1.AC9 DD1.AC10 DD1.AC11 DD1.AC12 DD1.AC14 DD1.AC15 DD1.AC16 DD1.AC17 DD1.AC19 DD1.AC20 DD1.AC21 DD1.AC22 DD1.AC24 DD1.AC25 DD1.AC26 DD1.AC27 DD1.AC29 DD1.AC30 DD1.AD1 DD1.AD2 DD1.AD3 DD1.AD4 DD1.AD6 DD1.AD7 DD1.AD8 DD1.AD9 DD1.AD11 DD1.AD12 DD1.AD13 DD1.AD14 DD1.AD16 DD1.AD17 DD1.AD18 DD1.AD19 DD1.AD21 DD1.AD22 DD1.AD23 DD1.AD24 DD1.AD26 DD1.AD27 DD1.AD28 DD1.AD29 DD1.AE1 DD1.AE3 DD1.AE4 DD1.AE5 DD1.AE6 DD1.AE8 DD1.AE9 DD1.AE10 DD1.AE11 DD1.AE13 DD1.AE14 DD1.AE15 DD1.AE16 DD1.AE18 DD1.AE19 DD1.AE20 DD1.AE21 DD1.AE23 DD1.AE24 DD1.AE25 DD1.AE26 DD1.AE28 DD1.AE29 DD1.AE30 DD1.AF1 DD1.AF2 DD1.AF3 DD1.AF5 DD1.AF6 DD1.AF7 DD1.AF8 DD1.AF10 DD1.AF11 DD1.AF12 DD1.AF13 DD1.AF15 DD1.AF16 DD1.AF17 DD1.AF18 DD1.AF20 DD1.AF21 DD1.AF22 DD1.AF23 DD1.AF25 DD1.AF26 DD1.AF27 DD1.AF28 DD1.AF30 DD1.AG2 DD1.AG3 DD1.AG4 DD1.AG5 DD1.AG7 DD1.AG8 DD1.AG9 DD1.AG10 DD1.AG12 DD1.AG13 DD1.AG14 DD1.AG15 DD1.AG17 DD1.AG18 DD1.AG19 DD1.AG20 DD1.AG22 DD1.AG23 DD1.AG24 DD1.AG25 DD1.AG27 DD1.AG28 DD1.AG29 DD1.AG30 DD1.AH1 DD1.AH2 DD1.AH4 DD1.AH5 DD1.AH6 DD1.AH7 DD1.AH9 DD1.AH10 DD1.AH11 DD1.AH12 DD1.AH14 DD1.AH15 DD1.AH16 DD1.AH17 DD1.AH19 DD1.AH20 DD1.AH21 DD1.AH22 DD1.AH24 DD1.AH25 DD1.AH26 DD1.AH27 DD1.AH29 DD1.AH30 DD1.AJ1 DD1.AJ2 DD1.AJ3 DD1.AJ4 DD1.AJ6 DD1.AJ7 DD1.AJ8 DD1.AJ9 DD1.AJ11 DD1.AJ12 DD1.AJ13 DD1.AJ14 DD1.AJ16 DD1.AJ17 DD1.AJ18 DD1.AJ19 DD1.AJ21 DD1.AJ22 DD1.AJ23 DD1.AJ24 DD1.AJ26 DD1.AJ27 DD1.AJ28 DD1.AJ29 DD1.AK1 DD1.AK3 DD1.AK4 DD1.AK5 DD1.AK6 DD1.AK8 DD1.AK9 DD1.AK10 DD1.AK11 DD1.AK13 DD1.AK14 DD1.AK15 DD1.AK16 DD1.AK18 DD1.AK19 DD1.AK20 DD1.AK21 DD1.AK23 DD1.AK24 DD1.AK25 DD1.AK26 DD1.AK28 DD1.AK29 DD1.AK30 DD1.B1 DD1.B2 DD1.B5 DD1.B6 DD1.B10 DD1.B12 DD1.B13 DD1.B14 DD1.B15 DD1.B17 DD1.B18 DD1.B19 DD1.B20 DD1.B22 DD1.B23 DD1.B24 DD1.B25 DD1.B27 DD1.B28 DD1.B29 DD1.B30 DD1.C3 DD1.C4 DD1.C7 DD1.C8 DD1.C10 DD1.C11 DD1.C12 DD1.C14 DD1.C15 DD1.C16 DD1.C17 DD1.C19 DD1.C20 DD1.C21 DD1.C22 DD1.C24 DD1.C25 DD1.C26 DD1.C27 DD1.C29 DD1.C30 DD1.D1 DD1.D2 DD1.D5 DD1.D6 DD1.D11 DD1.D12 DD1.D13 DD1.D14 DD1.D16 DD1.D17 DD1.D18 DD1.D19 DD1.D21 DD1.D22 DD1.D23 DD1.D24 DD1.D26 DD1.D27 DD1.D28 DD1.D29 DD1.E3 DD1.E4 DD1.E7 DD1.E8 DD1.E10 DD1.E11 DD1.E13 DD1.E14 DD1.E15 DD1.E16 DD1.E18 DD1.E19 DD1.E20 DD1.E21 DD1.E23 DD1.E24 DD1.E25 DD1.E26 DD1.E28 DD1.E29 DD1.E30 DD1.F1 DD1.F2 DD1.F5 DD1.F6 DD1.F10 DD1.F11 DD1.F12 DD1.F13 DD1.F15 DD1.F16 DD1.F17 DD1.F18 DD1.F20 DD1.F21 DD1.F22 DD1.F23 DD1.F25 DD1.F26 DD1.F27 DD1.F28 DD1.F30 DD1.G3 DD1.G4 DD1.G7 DD1.G8 DD1.G10 DD1.G12 DD1.G13 DD1.G14 DD1.G15 DD1.G17 DD1.G18 DD1.G19 DD1.G20 DD1.G22 DD1.G23 DD1.G24 DD1.G25 DD1.G27 DD1.G28 DD1.G29 DD1.G30 DD1.H1 DD1.H2 DD1.H5 DD1.H6 DD1.H10 DD1.H11 DD1.H12 DD1.H14 DD1.H15 DD1.H16 DD1.H17 DD1.H19 DD1.H20 DD1.H21 DD1.H22 DD1.H24 DD1.H25 DD1.H26 DD1.H27 DD1.H29 DD1.H30 DD1.J3 DD1.J4 DD1.J7 DD1.J8 DD1.J11 DD1.J12 DD1.J13 DD1.J14 DD1.J16 DD1.J17 DD1.J18 DD1.J19 DD1.J21 DD1.J22 DD1.J23 DD1.J24 DD1.J26 DD1.J27 DD1.J28 DD1.J29 DD1.K1 DD1.K2 DD1.K5 DD1.K6 DD1.K10 DD1.K11 DD1.K13 DD1.K14 DD1.K15 DD1.K16 DD1.K18 DD1.K19 DD1.K20 DD1.K21 DD1.K23 DD1.K24 DD1.K25 DD1.K26 DD1.K28 DD1.K29 DD1.K30 DD1.L3 DD1.L4 DD1.L7 DD1.L8 DD1.L10 DD1.L11 DD1.L12 DD1.L13 DD1.L15 DD1.L16 DD1.L17 DD1.L18 DD1.L20 DD1.L21 DD1.L22 DD1.L23 DD1.L25 DD1.L26 DD1.L27 DD1.L28 DD1.L30 DD1.M1 DD1.M2 DD1.M5 DD1.M6 DD1.M10 DD1.M19 DD1.M20 DD1.M22 DD1.M23 DD1.M24 DD1.M25 DD1.M27 DD1.M28 DD1.M29 DD1.M30 DD1.N3 DD1.N4 DD1.N7 DD1.N8 DD1.N19 DD1.N20 DD1.N21 DD1.N22 DD1.N24 DD1.N25 DD1.N26 DD1.N27 DD1.N29 DD1.N30 DD1.P1 DD1.P2 DD1.P5 DD1.P6 DD1.P15 DD1.P19 DD1.P21 DD1.P22 DD1.P23 DD1.P24 DD1.P26 DD1.P27 DD1.P28 DD1.P29 DD1.R3 DD1.R4 DD1.R7 DD1.R8 DD1.R14 DD1.R15 DD1.R19 DD1.R20 DD1.R21 DD1.R23 DD1.R24 DD1.R25 DD1.R26 DD1.R28 DD1.R29 DD1.R30 DD1.T1 DD1.T2 DD1.T5 DD1.T6 DD1.T14 DD1.T15 DD1.T20 DD1.T21 DD1.T22 DD1.T23 DD1.T25 DD1.T26 DD1.T27 DD1.T28 DD1.T30 DD1.U3 DD1.U4 DD1.U7 DD1.U8 DD1.U14 DD1.U15 DD1.U19 DD1.U20 DD1.U22 DD1.U23 DD1.U24 DD1.U25 DD1.U27 DD1.U28 DD1.U29 DD1.U30 DD1.V1 DD1.V2 DD1.V5 DD1.V6 DD1.V19 DD1.V20 DD1.V21 DD1.V22 DD1.V24 DD1.V25 DD1.V26 DD1.V27 DD1.V29 DD1.V30 DD1.W3 DD1.W4 DD1.W7 DD1.W8 DD1.W19 DD1.W21 DD1.W22 DD1.W23 DD1.W24 DD1.W26 DD1.W27 DD1.W28 DD1.W29 DD1.Y1 DD1.Y2 DD1.Y5 DD1.Y6 DD1.Y10 DD1.Y11 DD1.Y13 DD1.Y14 DD1.Y15 DD1.Y16 DD1.Y18 DD1.Y19 DD1.Y20 DD1.Y21 DD1.Y23 DD1.Y24 DD1.Y25 DD1.Y26 DD1.Y28 DD1.Y29 DD1.Y30 DD2.1 DD2.2 DD2.3 DD2.4 DD2.5 DD2.6 DD2.7 DD2.8 DD2.9 DD2.10 DD2.11 DD2.12 DD2.13 DD2.14 DD2.15 DD2.16 DD2.17 DD2.18 DD2.19 DD2.20 DD2.21 DD2.22 DD2.23 DD2.24 DD2.25 DD2.26 DD2.27 DD2.28 DD2.29 DD2.30 DD2.31 DD2.32 DD2.33 DD2.34 DD2.35 DD2.36 DD2.37 DD2.38 DD2.39 DD2.40 DD2.41 DD2.42 DD2.43 DD2.44 DD2.45 DD2.46 DD2.47 DD2.48 DD3.1 DD3.2 DD3.3 DD3.4 DD3.5 DD3.6 DD3.7 DD3.8 DD3.9 DD3.10 DD3.11 DD3.12 DD3.13 DD3.14 DD3.15 DD3.16 DD3.17 DD3.18 DD3.19 DD3.20 DD3.21 DD3.22 DD3.23 DD3.24 DD3.25 DD3.26 DD3.27 DD3.28 DD3.29 DD3.30 DD3.31 DD3.32 DD3.33 DD3.34 DD3.35 DD3.36 DD3.37 DD3.38 DD3.39 DD3.40 DD3.41 DD3.42 DD3.43 DD3.44 DD3.45 DD3.46 DD3.47 DD3.48 DS1.J1 DS1.J9 DS1.L1 DS1.L9 DS1.M7 DS2.J1 DS2.J9 DS2.L1 DS2.L9 DS2.M7 DS3.J1 DS3.J9 DS3.L1 DS3.L9 DS3.M7 DS4.J1 DS4.J9 DS4.L1 DS4.L9 DS4.M7 DS5.J1 DS5.J9 DS5.L1 DS5.L9 DS5.M7 DS6.J1 DS6.J9 DS6.L1 DS6.L9 DS6.M7 DS7.J1 DS7.J9 DS7.L1 DS7.L9 DS7.M7 DS8.J1 DS8.J9 DS8.L1 DS8.L9 DS8.M7 DS9.J1 DS9.J9 DS9.L1 DS9.L9 DS9.M7 DS10.J1 DS10.J9 DS10.L1 DS10.L9 DS10.M7 DS11.J1 DS11.J9 DS11.L1 DS11.L9 DS11.M7 DS12.J1 DS12.J9 DS12.L1 DS12.L9 DS12.M7 XS1.A1 XS1.A2 XS1.A3 XS1.A4 XS1.A5 XS1.A6 XS1.A7 XS1.A8 XS1.A9 XS1.A10 XS1.A11 XS1.A12 XS1.A13 XS1.A14 XS1.A15 XS1.A16 XS1.A17 XS1.A18 XS1.A19 XS1.A20 XS1.A21 XS1.A22 XS1.A23 XS1.A24 XS1.A25 XS1.A26 XS1.A27 XS1.A28 XS1.A29 XS1.A30 XS1.A31 XS1.A32 XS1.A33 XS1.A34 XS1.A35 XS1.A36 XS1.A37 XS1.A38 XS1.A39 XS1.A40 XS1.A41 XS1.A42 XS1.A43 XS1.A44 XS1.A45 XS1.A46 XS1.A47 XS1.A48 XS1.A49 XS1.A50 XS1.A51 XS1.A52 XS1.A53 XS1.A54 XS1.A55 XS1.A56 XS1.A57 XS1.A58 XS1.A59 XS1.A60 XS1.A61 XS1.A62 XS1.A63 XS1.A64 XS1.A65 XS1.A66 XS1.A67 XS1.A68 XS1.A69 XS1.A70 XS1.A71 XS1.A72 XS1.A73 XS1.A74 XS1.A75 XS1.A76 XS1.A77 XS1.A78 XS1.A79 XS1.A80 XS1.A81 XS1.A82 XS1.B1 XS1.B2 XS1.B3 XS1.B4 XS1.B5 XS1.B6 XS1.B7 XS1.B8 XS1.B9 XS1.B10 XS1.B11 XS1.B12 XS1.B13 XS1.B14 XS1.B15 XS1.B16 XS1.B17 XS1.B18 XS1.B19 XS1.B20 XS1.B21 XS1.B22 XS1.B23 XS1.B24 XS1.B25 XS1.B26 XS1.B27 XS1.B28 XS1.B29 XS1.B30 XS1.B31 XS1.B32 XS1.B33 XS1.B34 XS1.B35 XS1.B36 XS1.B37 XS1.B38 XS1.B39 XS1.B40 XS1.B41 XS1.B42 XS1.B43 XS1.B44 XS1.B45 XS1.B46 XS1.B47 XS1.B48 XS1.B49 XS1.B50 XS1.B51 XS1.B52 XS1.B53 XS1.B54 XS1.B55 XS1.B56 XS1.B57 XS1.B58 XS1.B59 XS1.B60 XS1.B61 XS1.B62 XS1.B63 XS1.B64 XS1.B65 XS1.B66 XS1.B67 XS1.B68 XS1.B69 XS1.B70 XS1.B71 XS1.B72 XS1.B73 XS1.B74 XS1.B75 XS1.B76 XS1.B77 XS1.B78 XS1.B79 XS1.B80 XS1.B81 XS1.B82

## Keep-outs
Keep-Out Layer:
  the board outline again, w0.1